# Altium PCB MocKhoatim.PcbDoc
Units mm, origin at the board's own origin, x right, y up, seen from the top; angles counter-clockwise.
Board outline 45.39 x 45.14 mm, 2 copper layers (Top Layer, Bottom Layer); 28 components, 36 nets, 105 pads, 35 vias.
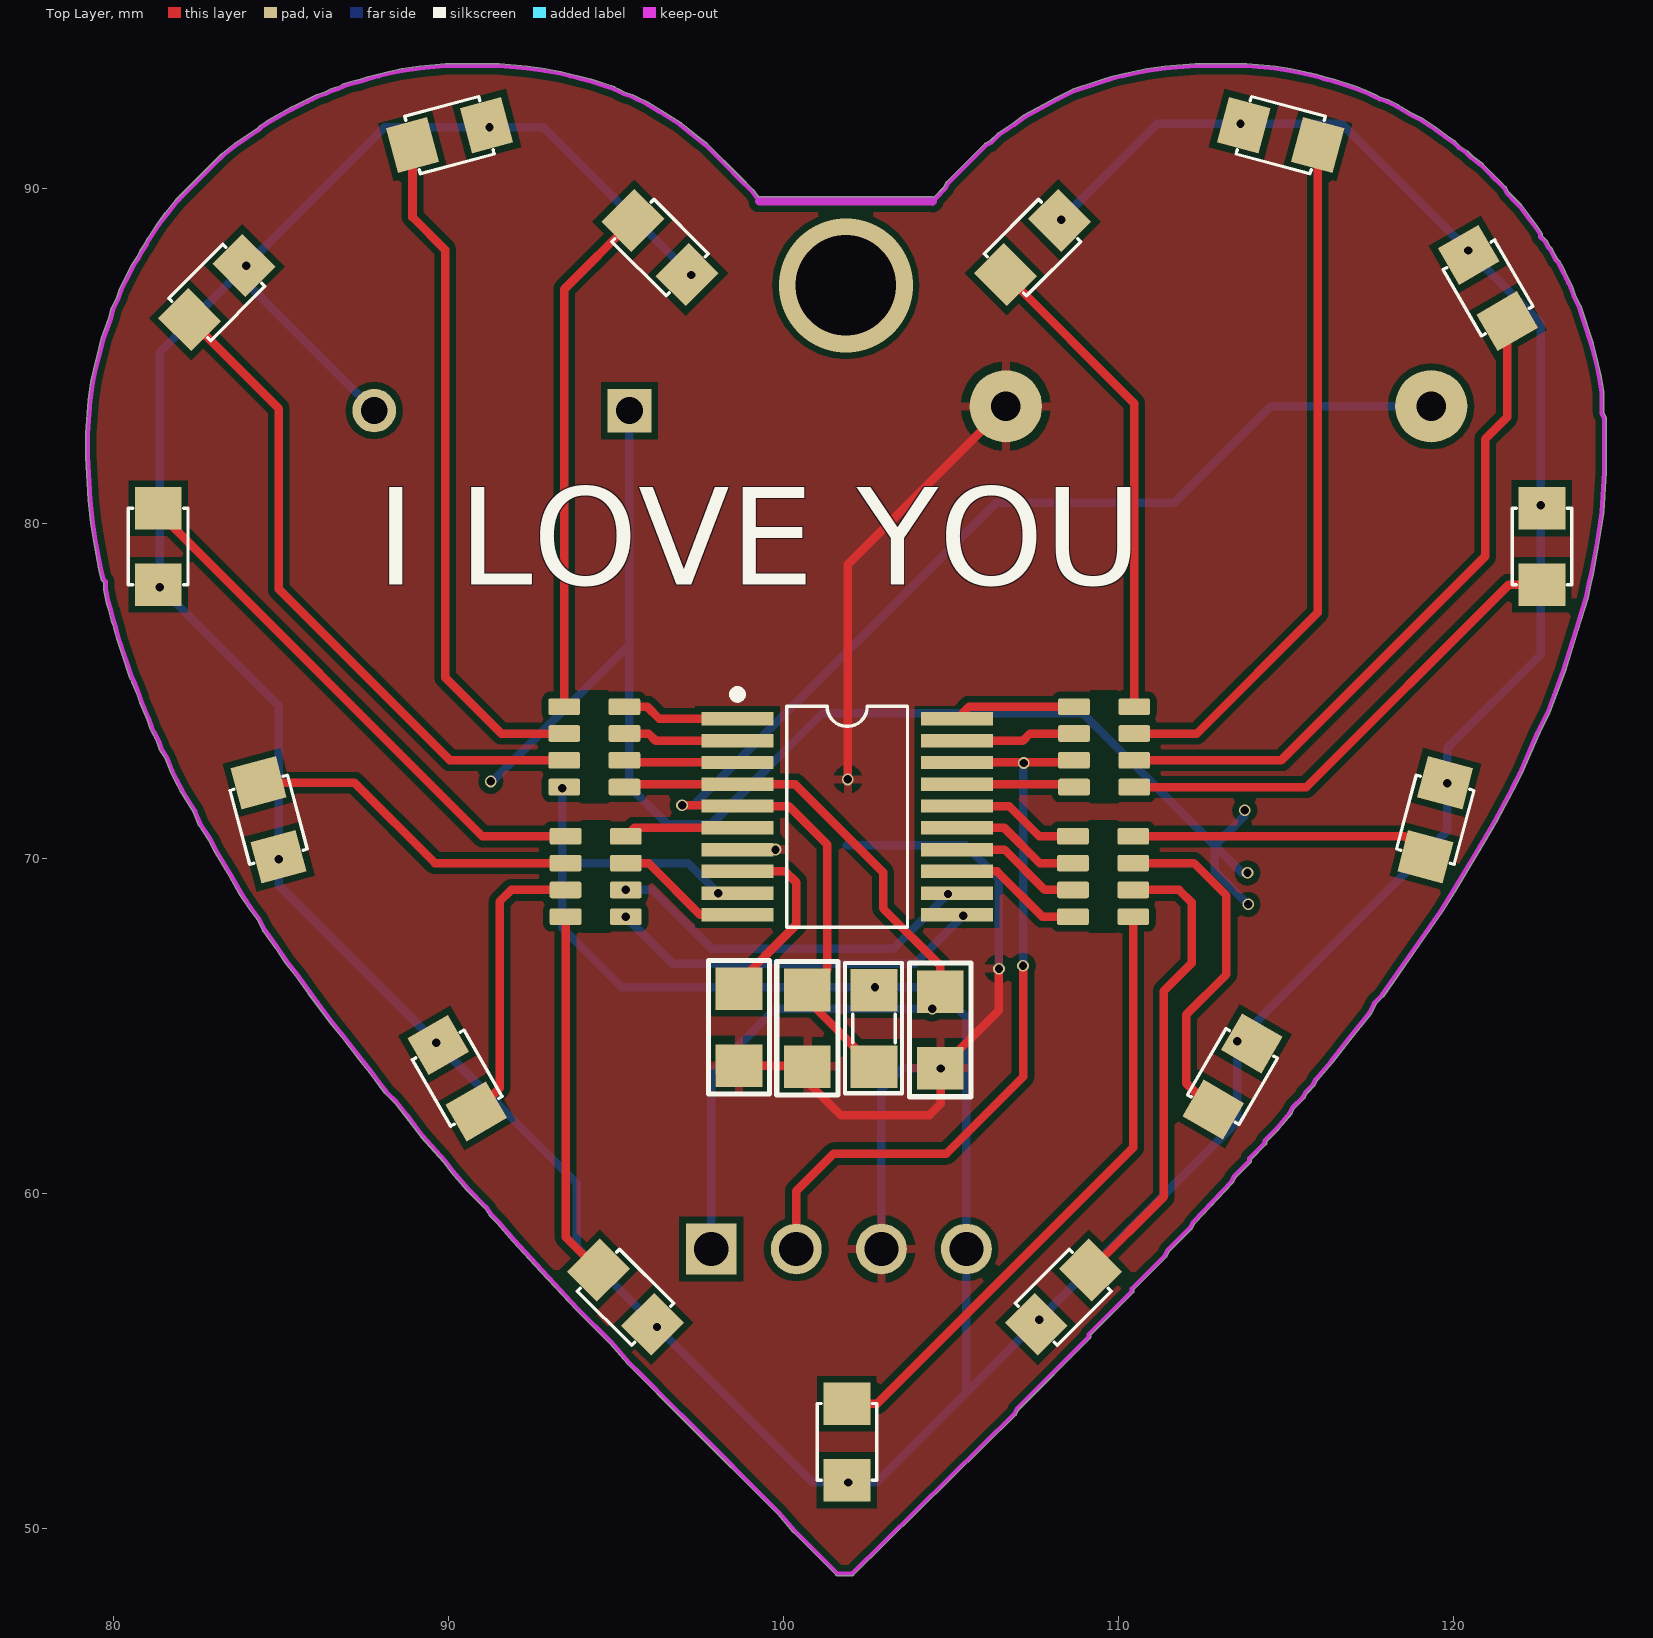
[diagram p0: Top Layer view]
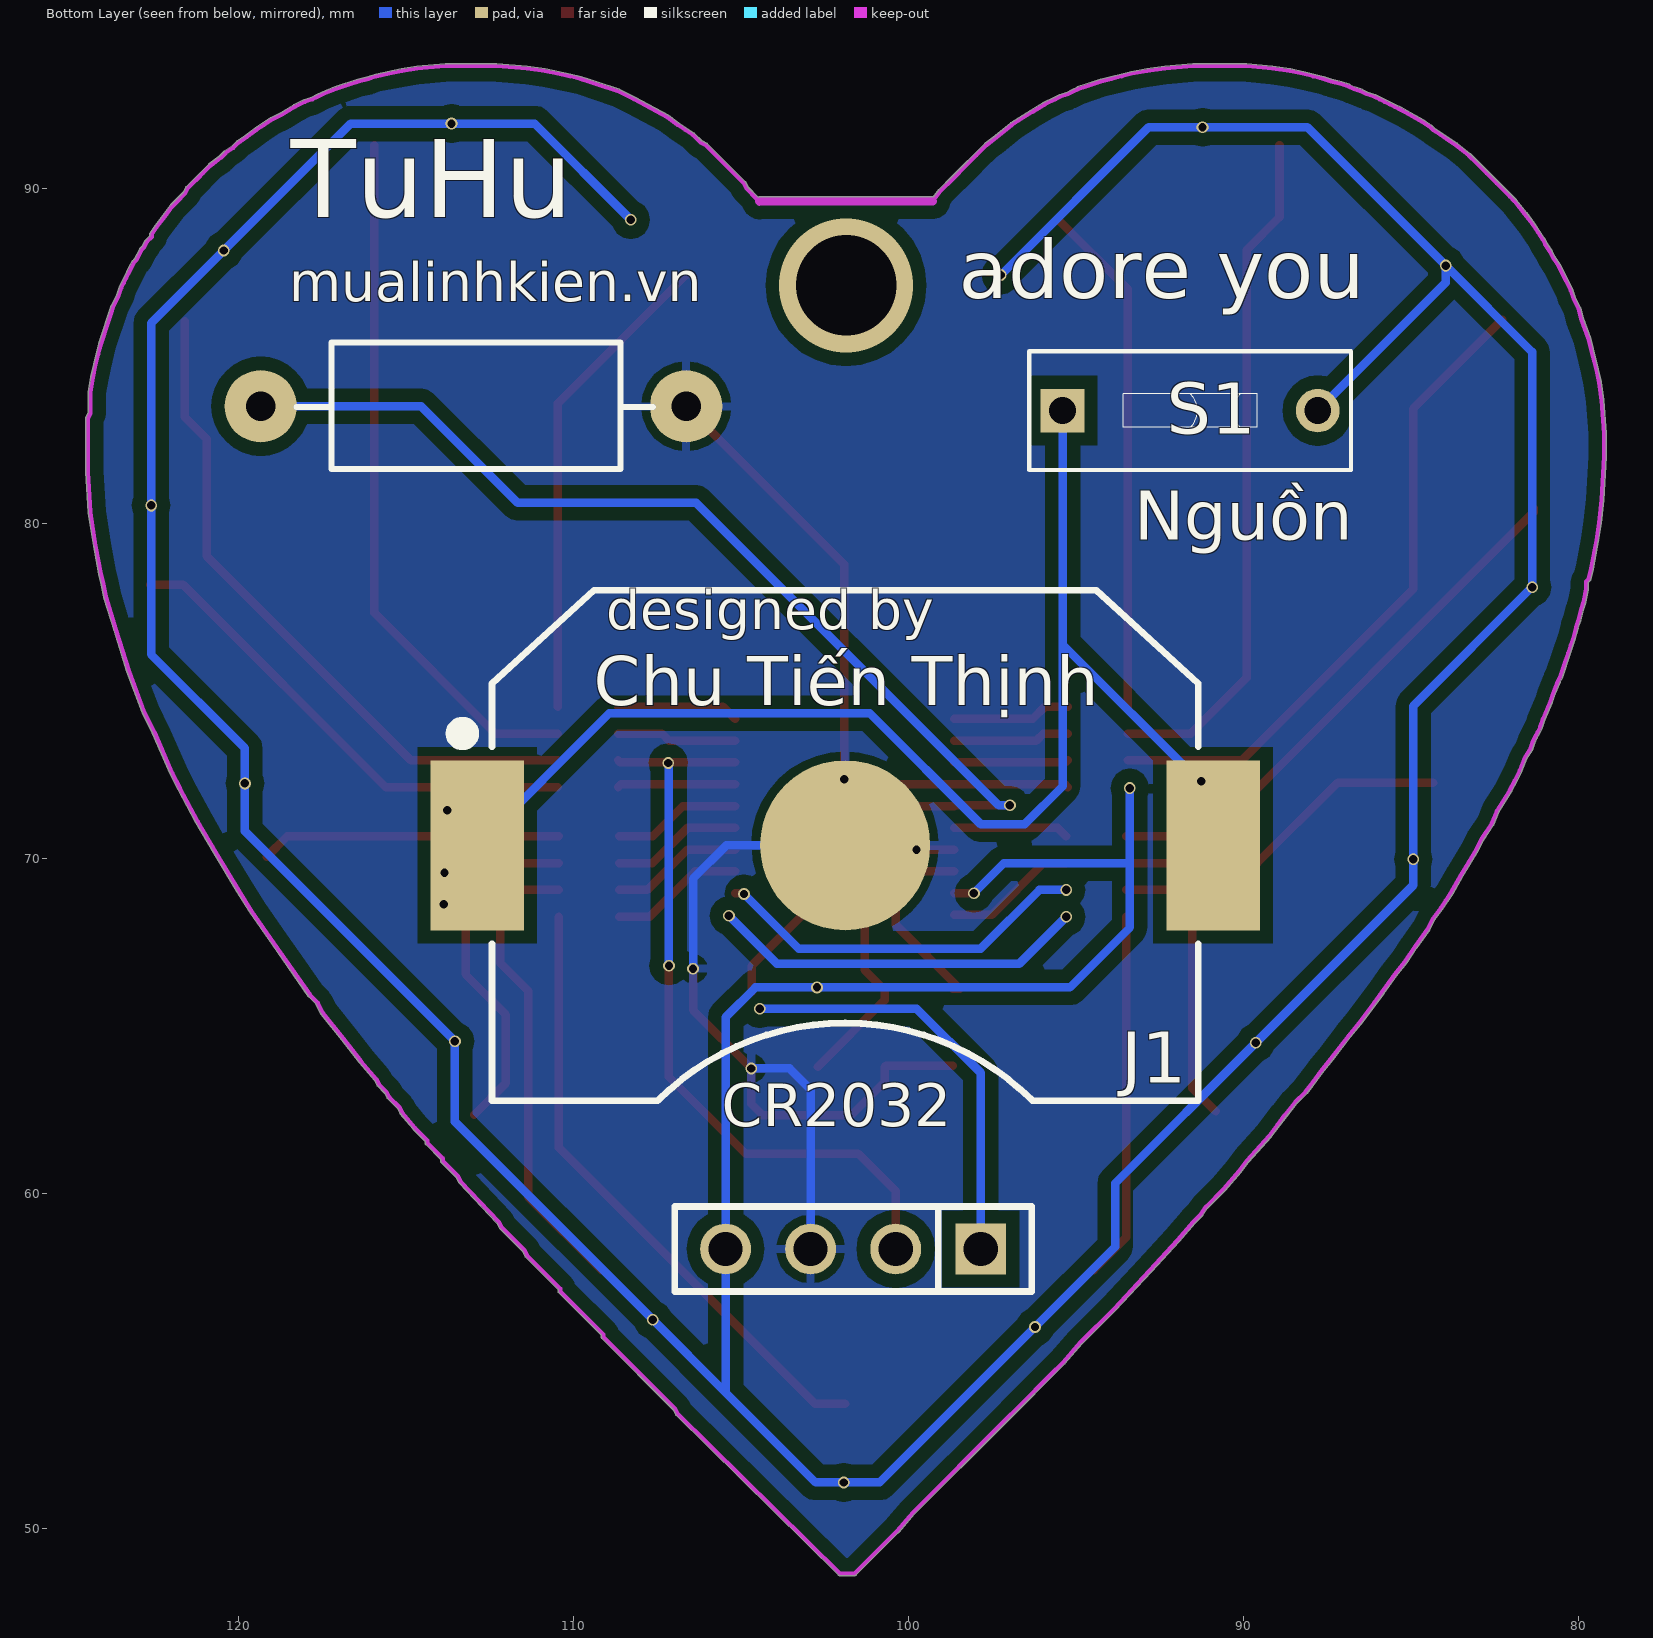
[diagram p1: Bottom Layer view, seen from below]
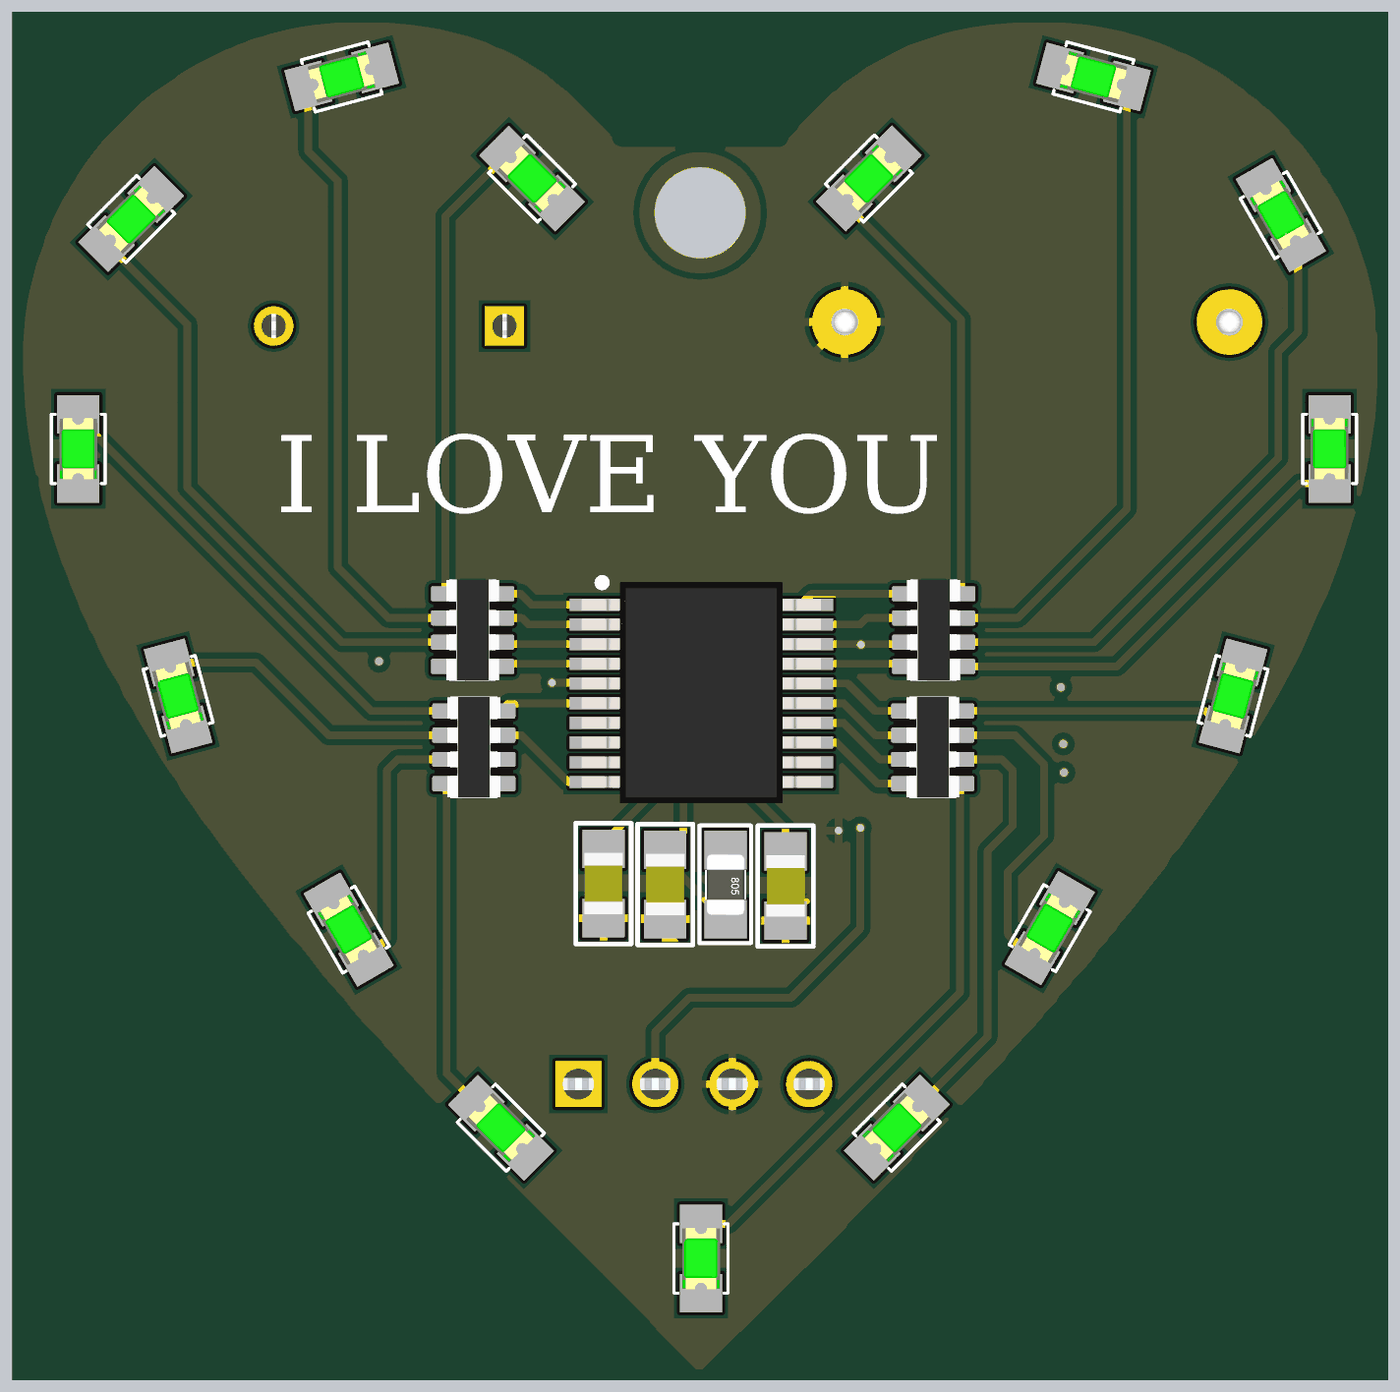
[diagram p2: 3D render of the assembled board from above, using the file's embedded part models]
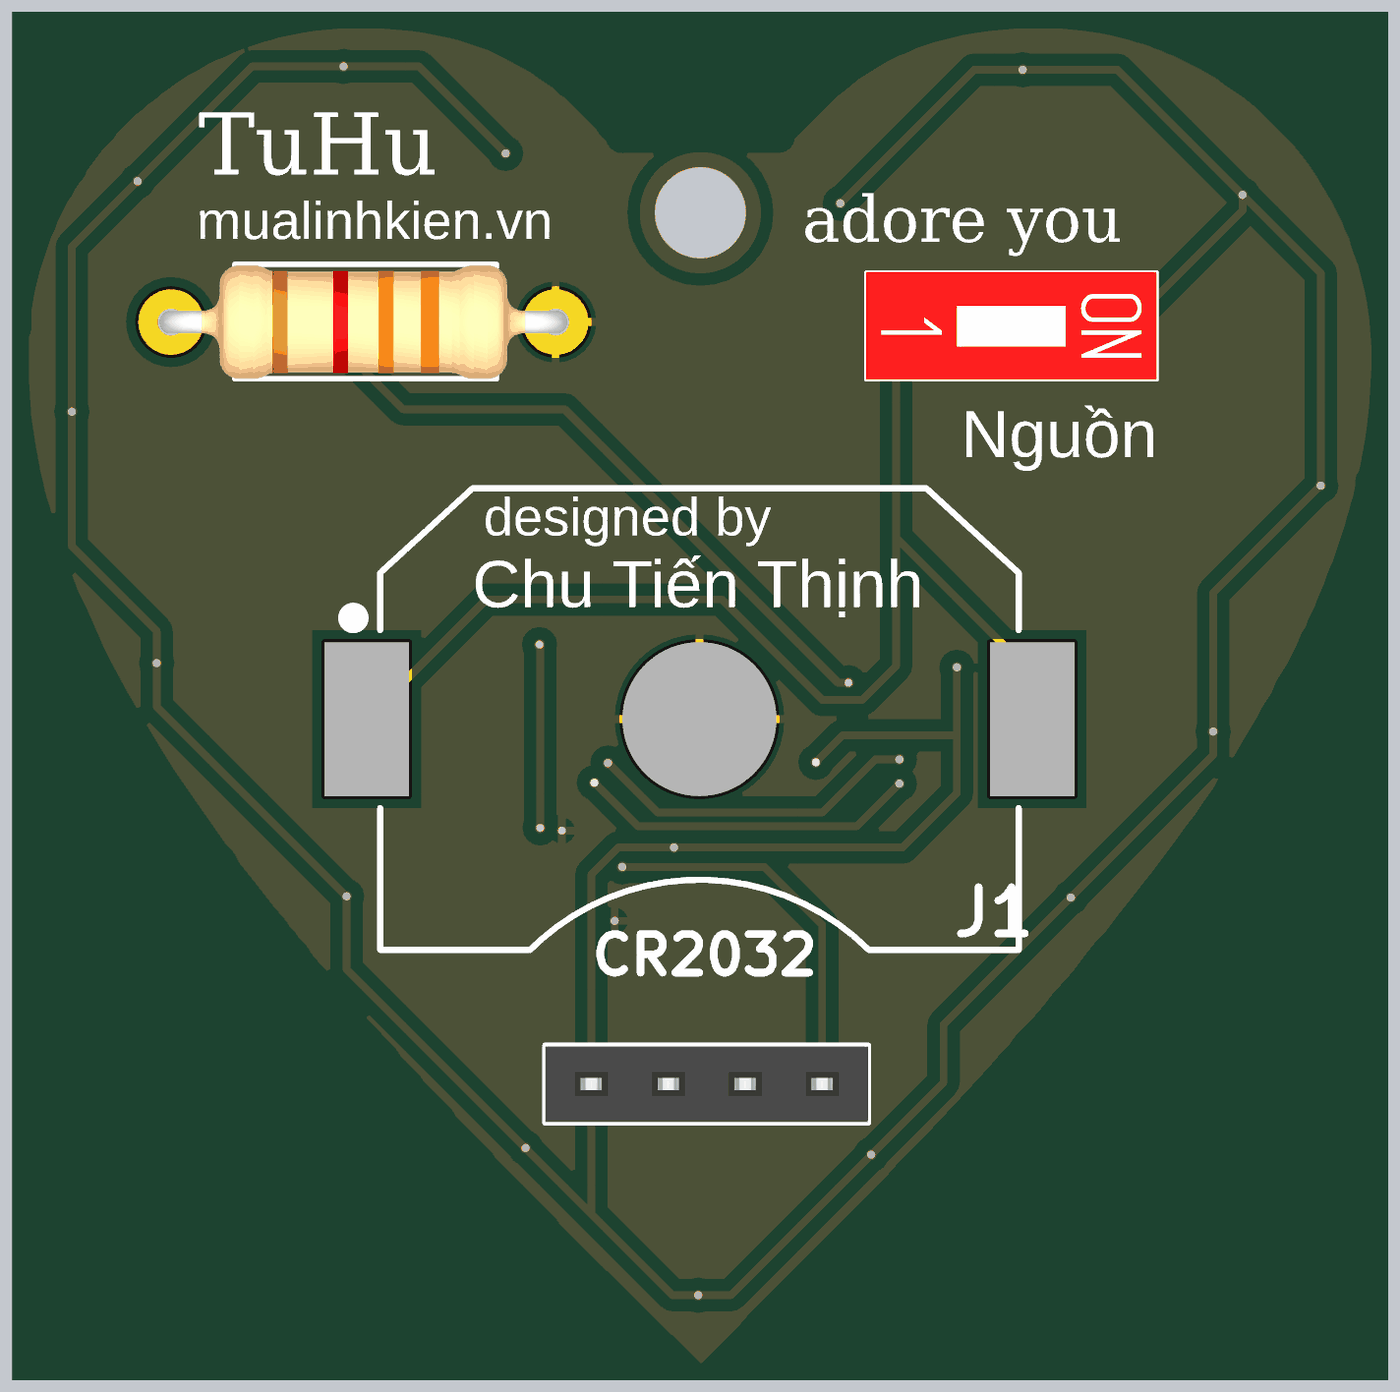
[diagram p3: 3D render of the assembled board from below, using the file's embedded part models]

## Layer stack, top to bottom
Top Solder: solder mask 0.0102, Solder Resist, Dk 3.5
Top Layer: signal copper 0.0356
Dielectric 1: dielectric 0.32, FR-4, Dk 4.8
Bottom Layer: signal copper 0.0356
Bottom Solder: solder mask 0.0102, Solder Resist, Dk 3.5

## Board outline
794 vertices, not listed, extent 79.159,48.577 124.549,93.714

## Design rules (kind name [scope] priority, off if disabled: settings)
Clearance [All] p1: gap=0.2 ignorepadtopadclearanceinfootprint=FALSE
PolygonConnect [All] p1: connectstyle=Relief reliefconductorwidth=0.254 reliefentries=4 polygonreliefangle="90 Angle" airgapwidth=0.254
RoutingVias [All] p1: holewidth=0.25 width=0.35 viastyle="Through Hole" minholewidth=0.25 minwidth=0.35 maxholewidth=0.25 maxwidth=0.35
SolderMaskExpansion [All] p1: expansion=0.102
Width [All] p1: maxlimit=0.5 minlimit=0.254 preferedwidth=0.4
30 further rules are at their usual default settings.

## Classes and differential pairs
component class TraiTimMocKhoa: J1 S1

## Components (designator, comment, footprint, x,y, rotation, side; value= is the part's Value field where it differs from the comment)
C1 "103" SM-0805 104.67,64.87 r270 top
C2 "103" SM-0805 98.66,64.95 r270 top
C3 "103" SM-0805 100.7,64.92 r270 top
C4 "JP4" JP4-C1T 97.83,58.33 r0 bottom
J1 "PIN3V-CR2032" "PIN3V - CR2032" 101.88,70.38 r180 bottom locked
LED1 "LED" LED-0805-Green 97.11,87.42 r135 top value="LED 3 - 5 ly 2 Colour"
LED2 "LED" LED-0805-Green 108.23,89.036 r225 top value="LED 3 - 5 ly 2 Colour"
LED3 "LED" LED-0805-Green 91.12,91.88 r195 top value="LED 3 - 5 ly 2 Colour"
LED4 "LED" LED-0805-Green 113.73,91.88 r345 top value="LED 3 - 5 ly 2 Colour"
LED5 "LED" LED-0805-Green 83.876,87.696 r225 top value="LED 3 - 5 ly 2 Colour"
LED6 "LED" LED-0805-Green 120.45,88.011 r300 top value="LED 3 - 5 ly 2 Colour"
LED7 "LED" LED-0805-Green 122.63,80.446 r270 top value="LED 3 - 5 ly 2 Colour"
LED8 "LED" LED-0805-Green 119.742,72.25 r255 top value="LED 3 - 5 ly 2 Colour"
LED9 "LED" LED-0805-Green 113.963,64.47 r240 top value="LED 3 - 5 ly 2 Colour"
LED10 "LED" LED-0805-Green 107.534,56.084 r45 top value="LED 3 - 5 ly 2 Colour"
LED11 "LED" LED-0805-Green 101.88,51.43 r90 top value="LED 3 - 5 ly 2 Colour"
LED12 "LED" LED-0805-Green 96.08,56.084 r135 top value="LED 3 - 5 ly 2 Colour"
LED13 "LED" LED-0805-Green 89.677,64.421 r300 top value="LED 3 - 5 ly 2 Colour"
LED14 "LED" LED-0805-Green 84.912,70.042 r105 top value="LED 3 - 5 ly 2 Colour"
LED15 "LED" LED-0805-Green 81.32,78.16 r90 top value="LED 3 - 5 ly 2 Colour"
R1 "RP330" RESCAXS50P160X320X70-8N 94.34,73.32 r0 top
R2 "RP330" RESCAXS50P160X320X70-8N 109.56,73.32 r180 top
R3 "RP330" RESCAXS50P160X320X70-8N 109.53,69.45 r180 top
R4 "RP330" RESCAXS50P160X320X70-8N 94.38,69.45 r0 top
R5 "1k" SM-RES-0805 102.69,66.056 r270 top value="R1/4W - 1K"
R6 "100" RES-1W 113.23,83.49 r180 bottom value="R1W - 100"
S1 "partNo" SW-DIP1-1 91.58,83.36 r270 bottom
U1 "STM8S003F3" SSOP20 101.89,71.23 r270 top

## Footprints (in the part's own frame and the unit in brackets; to place one, negate y for a bottom-side part, rotate by r counter-clockwise, add the part's x,y. Pads: shape width x height; smd on the part's side, far side on the other; paste and mask are expansions set on the pad)
JP4-C1T [mm] "4 row, straight, gold plating"
  rect 1.52x1.52 hole 1.02: 1(0,0)
  round 1.52 hole 1.02: 2(2.54,0) 3(5.08,0) 4(7.62,0)
  silkscreen extent -1.52,-1.27 9.14,1.27, body extent -1.52,-1.25 9.14,1.25, height 8.51
LED-0805-Green [mil]
  rect 50x55 smd: 1(0,0) 2(90,0)
  silkscreen extent 0,-35 90,35, body extent 5,-25 85,25, height 43
"PIN3V - CR2032" [mm] "CN-DIN, 3-Leads, Body 21.08x15.24mm"
  rect 2.79x5.08 smd: 1(-10.985,0) 2(10.985,0)
  round 5.08 smd: 3(0,0)
  silkscreen extent -11.68,-7.62 10.54,7.62, body extent -10.54,-10 10.57,10, height 4.1
RES-1W [mil]
  round 85 hole 35: 1(-240,0) 2(260,0)
  silkscreen extent -198,-74 221,75, body extent -255,-74 275,74, height 189
RESCAXS50P160X320X70-8N [mm]
  round 0.254 on Mech15: 0(0,0)
  rrect25% 0.95x0.5 smd: 1(-0.9,1.2) 2(-0.9,0.4) 3(-0.9,-0.4) 4(-0.9,-1.2) 5(0.9,-1.2) 6(0.9,-0.4) 7(0.9,0.4) 8(0.9,1.2)
  Top Layer pour cut-out: -0.4,1.7 0.4,1.7 0.4,-1.7 -0.4,-1.7
  body extent -0.87,-1.68 0.88,1.67, height 0.7
SM-0805 [mil] "Compoment SMD 80x50mil"
  rect 50x55 smd: 1(-45,0) 2(45,0)
  silkscreen extent -79,-36 78,36, body extent -40,-25 40,25, height 24
SM-RES-0805 [mil]
  rect 50x55 smd: 1(0,0) 2(90,0)
  silkscreen extent -32,-34 121,33, body extent 6,-25 84,25, height 31
SSOP20 [mm] "(STM8S003)"
  rect 0.4x2.15 smd: 1(-2.925,-3.275) 2(-2.275,-3.275) 3(-1.625,-3.275) 4(-0.975,-3.275) 5(-0.325,-3.275) 6(0.325,-3.275) 7(0.975,-3.275) 8(1.625,-3.275) 9(2.275,-3.275) 10(2.925,-3.275) 11(2.925,3.275) 12(2.275,3.275) 13(1.625,3.275) 14(0.975,3.275) 15(0.325,3.275) 16(-0.325,3.275) 17(-0.975,3.275) 18(-1.625,3.275) 19(-2.275,3.275) 20(-2.925,3.275)
  silkscreen extent -3.78,-3.4 3.3,1.8, body extent -3.68,-3.95 3.62,3.95, height 1.79
SW-DIP1-1 [mm] "01p, 2.54mm Pitch, Horizontal, Box Type, THT, flat Actuator, red, without Tape, Tube"
  rect 1.3x1.3 hole 0.8: 1(0,-3.81)
  round 1.3 hole 0.8: 2(0,3.81)
  silkscreen extent -1.77,-4.8 1.77,4.8, body extent -1.77,-4.8 1.77,4.8, height 5.4

## Part data
C1 C2 C3: library part CM, "Cap SMD"
C4: "WR-PHD 2.54 mm Angled Socket Header", Manufacturer="Würth Elektronik eiSos GmbH", partNo=613004143121, ComponentLink1 Description=Manufacturer, ComponentLink1URL=http://www.we-online.com, ComponentLink2 Description=Datasheet, ComponentLink2URL=http://katalog.we-online.de/em/datasheet/6130xx143121.pdf, Created by="Karrer Zheng", Created Date="29 March 2013", NoPins=04
J1: "Coin Cell Holder, 21.08 x 15.24 mm SMD", Manufacturer="Memory Protection Devices", PartNumber=BK-912-TR, Battery Series=2032, Battery Type, Function="Coin Cell, Retainer", Category="Battery Products", ComponentLink1Description="Manufacturer URL", ComponentLink1URL=http://www.memoryprotectiondevices.com/, ComponentLink2Description=Datasheet, ComponentLink2URL=http://www.memoryprotectiondevices.com/datasheets/BK-912-datasheet.pdf, ComponentLink3Description="Package Specification", ComponentLink3URL=http://www.memoryprotectiondevices.com/datasheets/BK-912-datasheet.pdf, Family="Battery Holders, Clips, Contacts", Mounting Technology="Surface Mount", Number of Cells=1, PackageDescription="3-Pin, CN-DIN, Body 21.08x15.24mm", PackageReference=CN-DIN-3
LED1 LED2 LED3 LED4 LED5 LED6 LED7 LED8 LED9 LED10 LED11 LED12 LED13 LED14 LED15: library part "LED SMD"
R1 R2 R3 R4: library part ResPack
R5: library part R1/4W, "Resistor 1/4W"
R6: library part R1W, "Resistor 1W"
S1: library part SWDIP1, "WS-DITV 2.54 mm small compact THT flat actuator with top tape", Manufacturer="Wurth Elektronik", Part No.=418127160901, ComponentLink1 Description=Manufacturer, ComponentLink1URL=http://www.we-online.com, ComponentLink2 Description=Datasheet, ComponentLink2URL=http://katalog.we-online.de/em/datasheet/4181271609xx.pdf, Created by="Baojun Chen", Created Date=Dec.2015, Pole=01

## Via types
v1: diameter 0.35, hole 0.25, Top Layer to Bottom Layer, tented both sides, 34 vias
v2: diameter 4, hole 3, Top Layer to Bottom Layer, tented both sides, 1 vias

## Nets (pads, with @x,y where several pads share a name; then routed paths per layer and width w, separated by ;. In a path a pad name is that pad's centre, name@x,y a point inside that pad or via, vN(x,y) a via of type N, cw(c..) or ccw(c..) an arc to the next point about the centre after c; other vN are vias at no path point)
GND: C1.2 C2.2 C3.2 C4.3 J1.3 R6.2 U1.7 | length 40.5
  Top Layer w0.254: U1.7 v1(99.75,70.255) ; C2.2 100.67,63.807 C3.2 100.7,63.32 101.69,62.33 104.35,62.33 104.68,62.66 v1(104.68,63.72) 106.42,65.46 v1(106.42,66.7) ; v1(101.91,72.35) 101.91,78.774 R6.2
  Bottom Layer w0.254: J1.3 105.43,70.38 106.42,69.39 v1(106.42,66.7) ; C4.3 102.91,63.09 103.54,63.72 v1(104.68,63.72)
NetC2_1: C2.1 U1.8 | length 6.1
  Top Layer w0.254: U1.8 100.045,69.605 100.37,69.28 100.37,68.01 98.453,66.093 C2.1
NetJ1_1: J1.1 J1.2 S1.1 | length 42.9
  Bottom Layer w0.254: J1.2@91.275,72.265 95.39,76.38 ; S1.1 95.39,76.38 ; v1(113.76,71.43) 113.76,71.275 J1.1 ; v1(113.84,69.56) 113.686,69.56 J1.1 ; v1(113.86,68.62) 112.865,69.615 J1.1 ; 95.39,76.38 95.39,72.14 96.52,71.01 97.83,71.01 101.15,74.33 108.916,74.33 J1.1
  other v1: 91.25,72.29
NetLED1_2: LED1.2 R1.1 | length 15.4
  Top Layer w0.254: R1.1 93.44,86.983 LED1.2
NetLED2_2: LED2.2 R2.4 | length 14.5
  Top Layer w0.254: LED2.2 110.46,83.574 R2.4
NetLED3_2: LED3.2 R1.2 | length 20.5
  Top Layer w0.254: LED3.2 88.912,89.138 89.89,88.16 89.89,75.39 91.56,73.72 R1.2
NetLED4_2: LED4.2 R2.3 | length 20.9
  Top Layer w0.254: R2.3 112.33,73.72 115.938,77.328 LED4.2
NetLED5_2: LED5.2 R1.3 | length 19.8
  Top Layer w0.254: LED5.2 84.92,83.42 84.92,78.03 90.03,72.92 R1.3
NetLED6_2: LED6.2 R2.2 | length 20.3
  Top Layer w0.254: R2.2 114.85,72.92 120.94,79.01 120.94,82.51 121.593,83.163 LED6.2
NetLED7_2: LED7.2 R2.1 | length 14.7
  Top Layer w0.254: R2.1 115.6,72.12 121.64,78.16 LED7.2
NetLED8_2: LED8.2 R3.4 | length 9
  Top Layer w0.254: R3.4 118.542,70.65 LED8.2
NetLED9_2: LED9.2 R3.3 | length 10.6
  Top Layer w0.254: R3.3 112.24,69.85 113.21,68.88 113.21,66.53 112.01,65.33 112.01,63.28 LED9.2@112.958,62.332
NetLED10_2: LED10.2 R3.2 | length 14.1
  Top Layer w0.254: LED10.2 111.34,59.89 111.34,66.03 112.17,66.86 112.17,68.68 111.8,69.05 R3.2
NetLED11_2: LED11.2 R3.1 | length 18.6
  Top Layer w0.254: LED11.2 102.786,53.716 110.43,61.36 R3.1
NetLED12_2: LED12.2 R4.4 | length 11
  Top Layer w0.254: R4.4 93.48,58.684 LED12.2
NetLED13_2: LED13.2 R4.3 | length 8.7
  Top Layer w0.254: LED13.2 91.51,63.131 91.51,68.7 91.86,69.05 R4.3
NetLED14_2: LED14.2 R4.2 | length 10.2
  Top Layer w0.254: LED14.2 87.18,72.25 89.58,69.85 R4.2
NetLED15_2: LED15.2 R4.1 | length 16.3
  Top Layer w0.254: LED15.2 81.32,80.33 91,70.65 R4.1
NetR1_6: R1.6 U1.3 | length 3.4
  Top Layer w0.254: R1.6 95.305,72.855 U1.3
NetR1_7: R1.7 U1.2 | length 3.5
  Top Layer w0.254: R1.7 95.96,73.72 96.175,73.505 U1.2
NetR1_8: R1.8 U1.1 | length 3.5
  Top Layer w0.254: R1.8 95.92,74.52 96.285,74.155 U1.1
NetR2_5: R2.5 U1.20 | length 3.6
  Top Layer w0.254: U1.20 105.53,74.52 R2.5
NetR2_6: R2.6 U1.19 | length 3.6
  Top Layer w0.254: U1.19 107.135,73.505 107.35,73.72 R2.6
NetR2_8: R2.8 U1.17 | length 3.5
  Top Layer w0.254: U1.17 108.575,72.205 R2.8
NetR3_5: R3.5 U1.16 | length 3.8
  Top Layer w0.254: U1.16 106.725,71.555 107.63,70.65 R3.5
NetR3_6: R3.6 U1.15 | length 3.9
  Top Layer w0.254: U1.15 106.577,70.905 107.632,69.85 R3.6
NetR3_7: R3.7 U1.14 | length 4
  Top Layer w0.254: U1.14 106.585,70.255 107.79,69.05 R3.7
NetR3_8: R3.8 U1.13 | length 4
  Top Layer w0.254: U1.13 106.365,69.605 107.72,68.25 R3.8
NetR4_5: R4.5 U1.11 | length 11.2
  Bottom Layer w0.254: v1(95.28,68.25) 96.684,66.846 103.916,66.846 v1(105.35,68.28)
NetR4_6: R4.6 U1.12 | length 11.3
  Top Layer w0.254: U1.12@104.9,68.955 U1.12
  Bottom Layer w0.254: v1(95.28,69.05) 96.08,69.05 97.83,67.3 103.27,67.3 v1(104.9,68.93)
NetR4_7: R4.7 U1.10 | length 4
  Top Layer w0.254: R4.7 95.96,69.85 97.505,68.305 U1.10
NetR4_8: R4.8 U1.6 | length 3.4
  Top Layer w0.254: R4.8 95.535,70.905 U1.6
NRST: C1.1 C4.1 R1.5 U1.4 | length 25.8
  Top Layer w0.254: R1.5 95.325,72.205 U1.4 100.335,72.205 102.96,69.58 102.96,68.5 104.67,66.79 C1.1
  Bottom Layer w0.254: C4.1 97.83,63.59 99.74,65.5 v1(104.43,65.5)
SW: C3.1 R5.2 R6.1 U1.5 | length 39.8
  Top Layer w0.254: v1(96.96,71.58) 98.59,71.58 U1.5 100.145,71.555 101.3,70.4 101.3,66.663 C3.1 100.7,65.76 R5.2
  Bottom Layer w0.254: v1(96.96,71.58) 97.3,71.58 106.33,80.61 111.66,80.61 114.54,83.49 R6.1
SWIM: C4.2 R2.7 U1.18 | length 22.8
  Top Layer w0.254: C4.2 100.37,60.06 101.49,61.18 104.85,61.18 107.14,63.47 v1(107.14,66.79) ; U1.18 108.595,72.855 R2.7
  Bottom Layer w0.254: v1(107.14,66.79) 107.14,72.82 v1(107.16,72.84)
VCC: C4.4 LED1.1 LED2.1 LED3.1 LED4.1 LED5.1 LED6.1 LED7.1 LED8.1 LED9.1 LED10.1 LED11.1 LED12.1 LED13.1 LED14.1 LED15.1 R1.4 R5.1 S1.2 U1.9 | length 165.1
  Top Layer w0.254: v1(98.035,68.955) U1.9
  Bottom Layer w0.254: S1.2 83.95,87.18 v1(83.95,87.69) ; v1(93.38,72.09) 93.38,69.85 ; v1(97.23,87.41) 92.82,91.82 v1(91.21,91.82) 88.08,91.82 v1(83.95,87.69) ; v1(98.035,68.955) 97.14,69.85 93.38,69.85 ; v1(108.28,89.06) 111.15,91.93 v1(113.63,91.93) 116.64,91.93 v1(120.43,88.14) 122.6,85.97 v1(122.6,80.53) 122.6,76.08 119.8,73.28 v1(119.8,72.23) 119.8,70.8 v1(113.53,64.53) 113.53,62.13 v1(107.62,56.22) 105.45,54.05 ; v1(83.95,87.69) 81.37,85.11 v1(81.37,78.09) 84.92,74.54 v1(84.92,69.97) 84.92,69.19 v1(89.62,64.49) 93.82,60.29 93.82,58.39 v1(96.21,56) 100.85,51.36 v1(101.92,51.36) 102.76,51.36 105.45,54.05 ; 93.38,69.85 93.38,67.93 95.17,66.14 v1(102.72,66.14) 104.56,66.14 105.45,65.25 C4.4 105.45,54.05
pads on no net: R1.0 R2.0 R3.0 R4.0
copper on no net:
  other v2: 101.85,87.1

## Polygon pours and split planes (outlines as drawn)
GND on Bottom Layer "Top Layer-No Net" (solid, pour order 4): 99.263,89.611 97.59,91.342 95.606,92.659 93.07,93.53 90.84,93.67 89.48,93.63 87.376,93.193 85.166,92.278 83.642,91.288 82.27,89.94 80.975,88.316 79.908,86.106 79.375,84.201 79.223,82.677 79.299,80.696 79.604,78.638 79.985,77.114 80.747,74.905 81.89,72.314 83.795,68.961 87.25,64.21 90.908,59.79 94.844,55.55 101.6,48.641 102.035,48.641 106.883,53.416 112.39,59.28 117.627,65.684 120.25,69.45 121.971,72.542 123.18,75.35 123.952,77.8 124.48,80.61 124.5,82.8 124.104,85.344 123.228,87.554 122.199,89.154 120.523,90.907 118.694,92.202 116.103,93.269 113.817,93.65 111.64,93.64 109.55,93.193 108.331,92.735 106.426,91.592 105.26,90.503 104.521,89.687 103.93,89.611
GND on Top Layer "Top Layer-No Net" (solid, pour order 8): 102.035,48.641 106.883,53.416 109.093,55.702 112.141,58.979 115.494,62.865 117.627,65.684 119.609,68.428 121.971,72.542 122.809,74.371 123.952,77.8 124.409,80.315 124.485,83.06 124.404,83.93 123.952,85.801 123.266,87.478 122.232,89.11 120.142,91.211 118.313,92.431 115.875,93.345 113.817,93.65 111.73,93.66 109.55,93.193 107.93,92.61 106.426,91.592 104.902,90.145 104.521,89.687 99.263,89.611 98.273,90.678 96.49,92.154 94.234,93.193 92.329,93.574 90.12,93.68 88.595,93.497 86.843,93.04 84.633,91.973 83.033,90.754 81.89,89.611 80.747,87.935 79.75,85.86 79.299,83.668 79.223,81.991 79.451,79.477 80.061,76.886 81.356,73.457 83.033,70.256 85.35,66.64 87.909,63.322 91.76,58.83 96.672,53.645 101.6,48.641

## Keep-outs
Keep-Out Layer:
  lines w0.127: 99.263,89.611 99.035,89.916 98.654,90.297 98.273,90.678 97.968,90.983 97.663,91.288 97.358,91.516 96.901,91.897 96.291,92.278 95.91,92.507 95.606,92.659 95.453,92.735 95.225,92.812 95.072,92.888 94.92,92.964 94.691,93.04 94.463,93.116 94.234,93.193 93.929,93.269 93.624,93.345 93.32,93.421 92.862,93.497 92.329,93.574 91.491,93.65 89.891,93.65 89.129,93.574 88.595,93.497 88.214,93.421 87.909,93.345 87.605,93.269 87.376,93.193 87.071,93.116 86.843,93.04 86.69,92.964 86.462,92.888 86.309,92.812 86.081,92.735 85.928,92.659 85.776,92.583 85.623,92.507 85.471,92.431 85.319,92.354 85.166,92.278 84.633,91.973 84.404,91.821 84.328,91.745 84.099,91.592 83.871,91.44 83.642,91.288 83.261,90.983 83.033,90.754 82.728,90.449 82.423,90.145 82.042,89.764 81.89,89.611 81.585,89.23 81.356,88.925 81.204,88.697 81.051,88.468 80.975,88.316 80.823,88.087 80.747,87.935 80.594,87.706 80.366,87.249 80.213,86.944 80.137,86.716 80.061,86.563 79.985,86.411 79.908,86.106 79.68,85.496 79.604,85.192 79.451,84.582 79.375,84.201 79.299,83.668 79.223,82.677 79.223,81.991 79.299,80.696 79.375,80.01 79.451,79.477 79.604,78.638 79.68,78.334 79.756,78.257 79.756,78.029 79.832,77.648 79.908,77.419 79.985,77.114 80.061,76.886 80.137,76.581 80.213,76.352 80.289,76.124 80.366,75.895 80.442,75.667 80.518,75.438 80.594,75.286 80.747,74.905 80.823,74.676 81.051,74.143 81.128,73.914 81.204,73.762 81.28,73.609 81.356,73.457 81.432,73.228 81.585,73 81.737,72.619 81.89,72.314 82.042,72.009 82.423,71.399 82.575,71.018 82.88,70.561 83.033,70.256 83.261,69.875 83.49,69.494 83.795,68.961 83.947,68.732 84.099,68.504 84.328,68.199 84.48,67.894 84.861,67.361 85.166,66.904 85.471,66.523 85.852,65.989 86.081,65.684 86.538,65.075 86.843,64.694 87.376,64.008 87.681,63.627 87.909,63.322 88.138,63.017 88.443,62.713 88.748,62.332 88.976,62.027 89.205,61.722 89.891,60.96 90.119,60.655 90.576,60.122 91.11,59.588 91.262,59.36 91.491,59.131 91.948,58.598 92.786,57.683 93.853,56.54 94.844,55.55 95.377,54.94 95.758,54.559 96.672,53.645 97.13,53.188 99.854,50.463 100.33,49.911 101.092,49.149 101.6,48.641 102.035,48.641 106.883,53.416 106.959,53.569 107.645,54.254 109.093,55.702 109.093,55.778 110.388,57.074 110.388,57.15 111.379,58.141 111.455,58.293 112.141,58.979 112.217,59.131 113.36,60.35 113.436,60.503 113.894,60.96 113.894,61.036 114.351,61.493 114.351,61.57 114.732,61.951 115.113,62.408 115.189,62.56 115.494,62.865 115.57,63.017 115.799,63.246 115.875,63.398 116.332,63.932 116.865,64.618 117.475,65.38 117.627,65.684 117.856,65.913 118.389,66.675 118.923,67.437 119.609,68.428 119.99,69.037 120.675,70.18 121.209,71.095 121.742,72.085 121.971,72.542 122.504,73.762 122.809,74.371 123.038,74.981 123.266,75.59 123.647,76.81 123.952,77.8 124.028,78.181 124.104,78.486 124.257,79.324 124.409,80.315 124.485,81.534 124.485,83.134 124.409,83.287 124.409,83.896 124.333,84.353 124.257,84.734 124.181,85.039 124.104,85.344 124.028,85.573 123.952,85.801 123.876,86.03 123.8,86.258 123.723,86.487 123.647,86.639 123.571,86.792 123.495,87.02 123.419,87.173 123.342,87.325 123.266,87.478 123.19,87.63 123.114,87.782 123.038,87.859 122.961,88.011 122.885,88.163 122.809,88.24 122.733,88.392 122.58,88.544 122.58,88.621 122.428,88.849 122.199,89.154 121.971,89.459 121.818,89.611 121.59,89.84 121.514,89.992 121.361,90.145 121.209,90.297 121.056,90.449 120.828,90.678 120.523,90.907 120.371,91.059 120.142,91.211 119.99,91.364 119.761,91.516 119.456,91.745 119.228,91.897 118.999,92.05 118.847,92.126 118.694,92.202 118.313,92.431 118.008,92.583 117.78,92.659 117.627,92.735 117.475,92.812 117.094,92.964 116.865,93.04 116.637,93.116 116.408,93.193 116.103,93.269 115.875,93.345 115.494,93.421 115.113,93.497 114.656,93.574 113.817,93.65 112.293,93.65 111.379,93.574 110.846,93.497 110.465,93.421 110.084,93.345 109.779,93.269 109.55,93.193 109.322,93.116 109.093,93.04 108.864,92.964 108.636,92.888 108.483,92.812 108.331,92.735 108.179,92.659 107.188,92.126 106.883,91.897 106.655,91.745 106.426,91.592 106.197,91.364 106.045,91.288 104.902,90.145 104.826,89.992 104.521,89.687 104.445,89.535
  lines w0.254: 99.263,89.611 104.445,89.611

## Silkscreen, mask and mechanical layers (free items; w line width, h text height)
Top Overlay:
  text "I LOVE YOU" at 87.83,77.21 h5
Bottom Overlay:
  text "TuHu" at 118.43,88.37 h4
  text "mualinhkien.vn" at 118.48,86.234 h2
  text "adore you" at 98.49,86.14 h3
  text "Nguồn" at 93.25,79.03 h2.5
  text "designed by" at 109.01,76.45 h2
  text "Chu Tiến Thịnh" at 109.38,74.08 h2.5

## Text inside footprints (layer, text, board x,y; h text height)
J1: Bottom Overlay "CR2032" at 105.563,61.998 h1.27